# EAGLE board rain sensor (EAGLE 6.5.0)
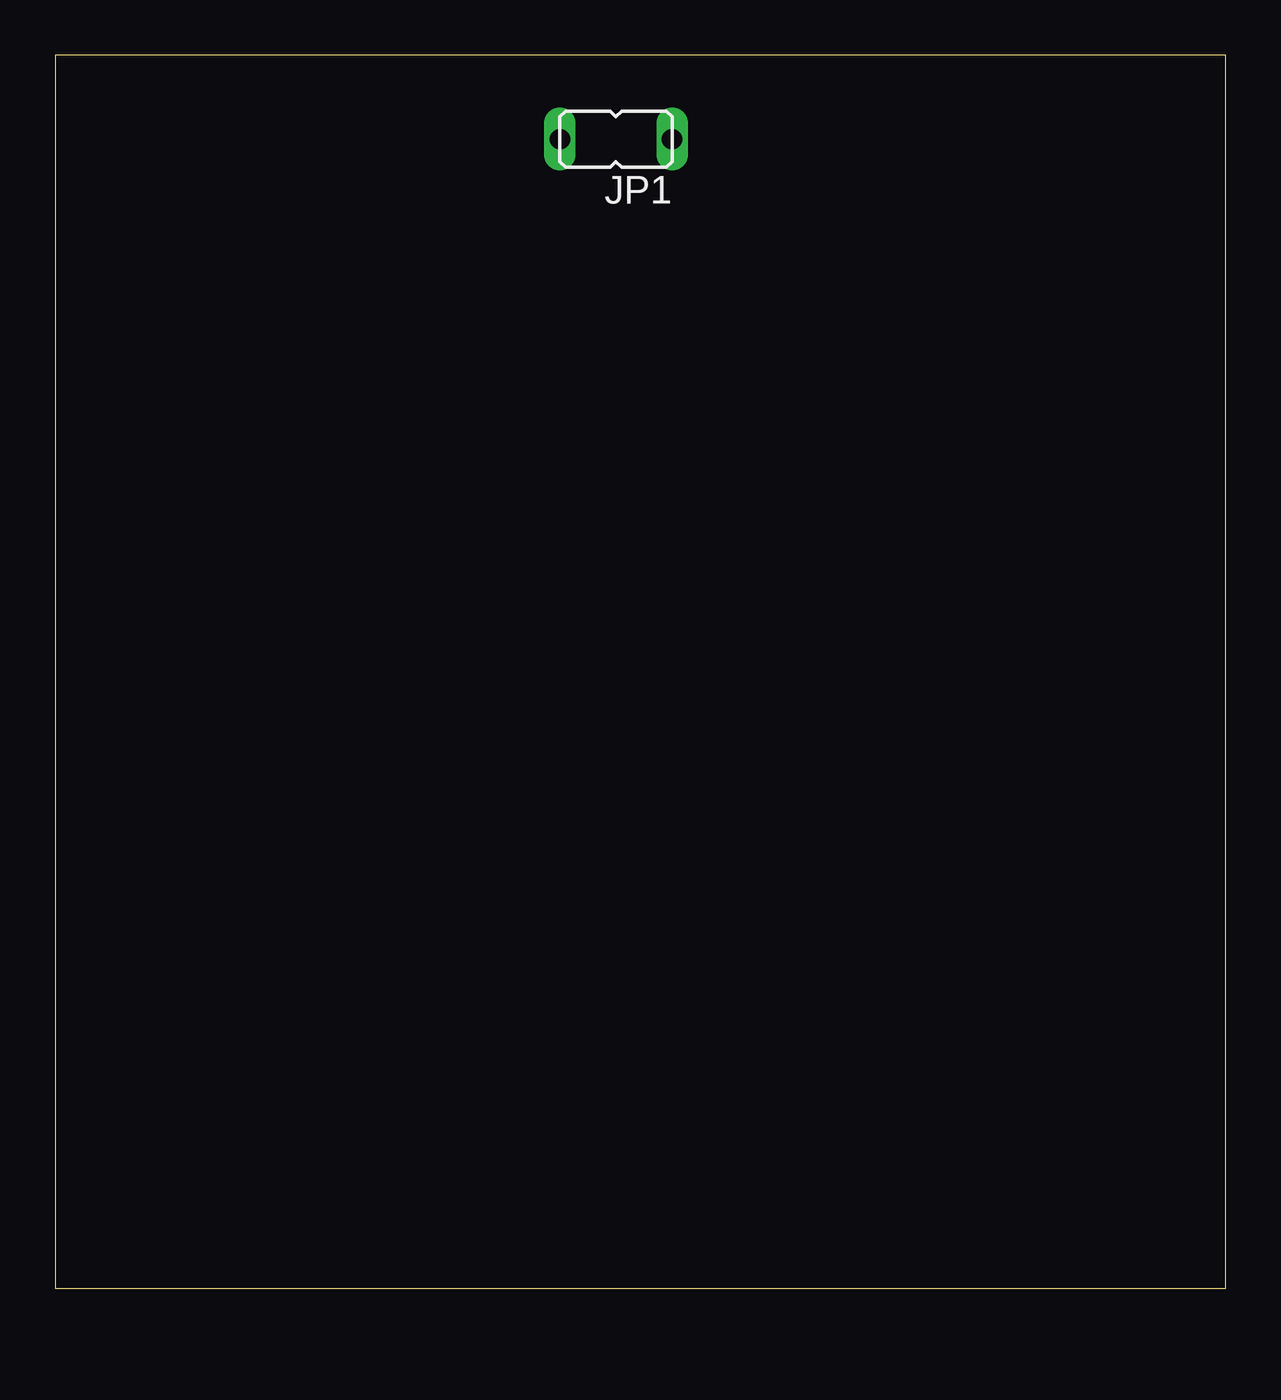
[diagram p0: board, top side]
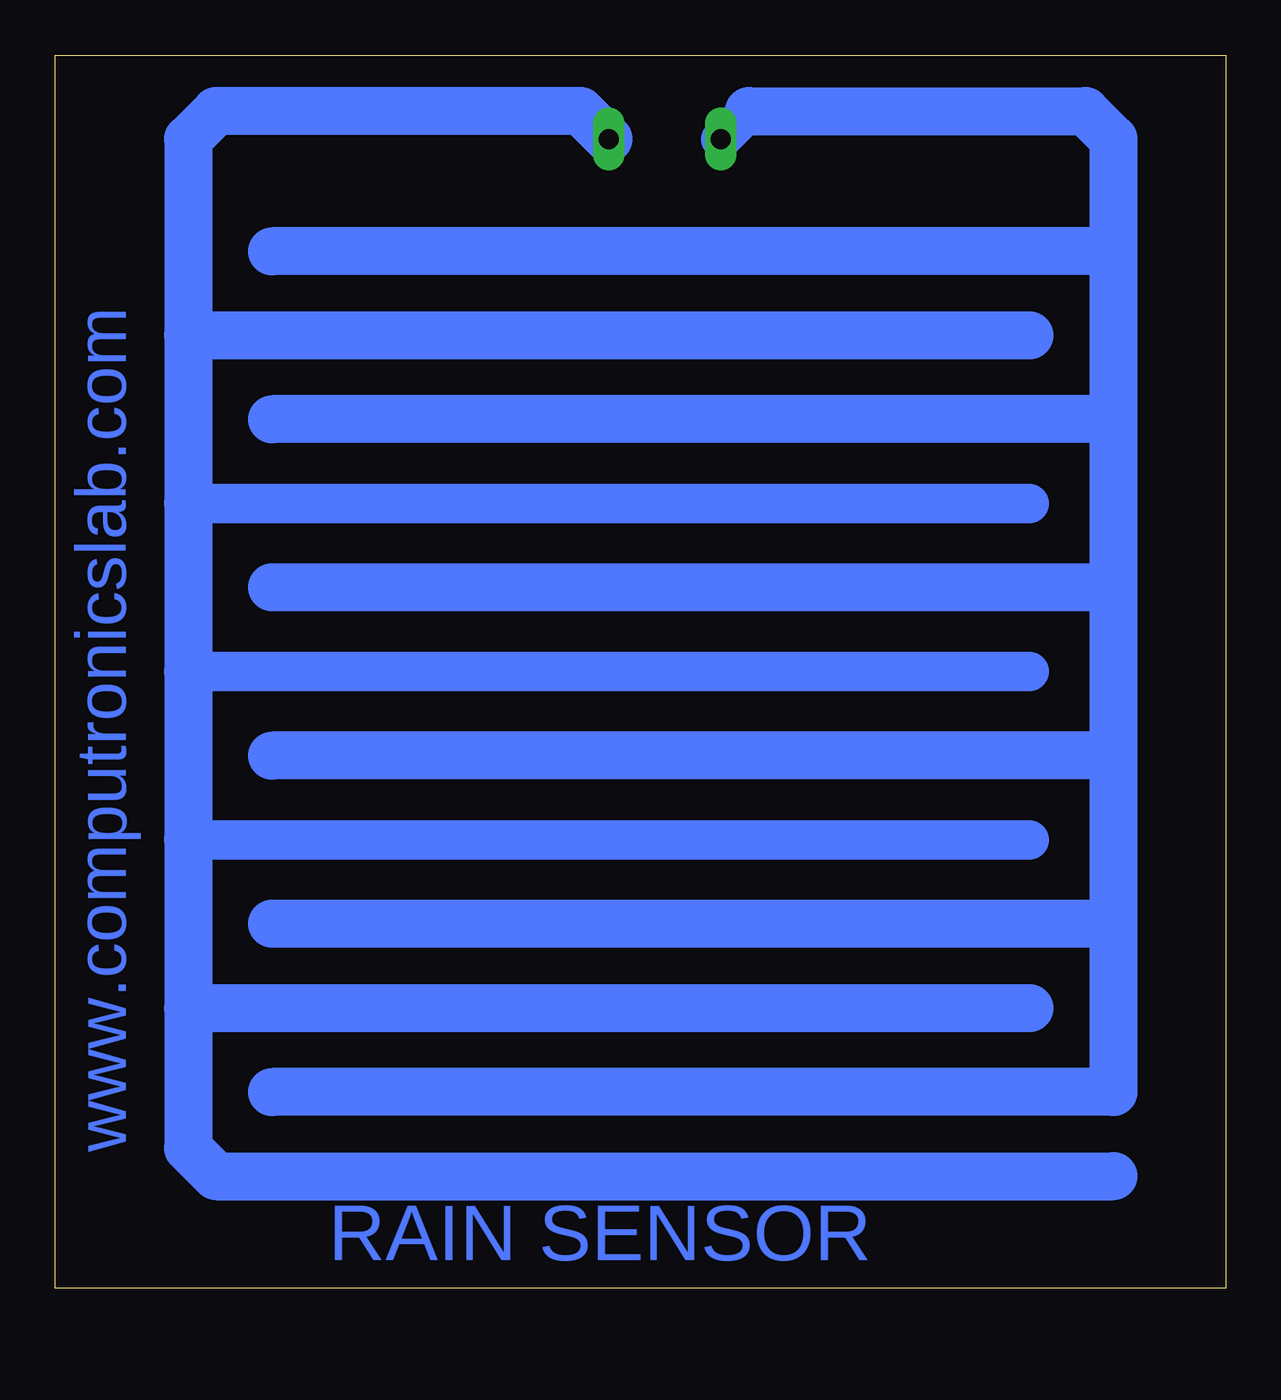
[diagram p1: board, bottom side, seen from below]

Size 53.01 x 55.87 mm. Coordinates in mm from the lower left corner, seen from the top.
Outline: 0,0 53.01,0 53.01,55.87 0,55.87 0,0
Copper layers (1*16): Top 0.035mm / dielectric 1.5mm / Bottom 0.035mm
Design rules "default": minimum track width 10mil, minimum drill 24mil, track to track 8mil, track to pad 8mil, pad to pad 8mil, via to via 8mil, smd to smd 8mil, copper to edge 40mil, drill to drill 8mil, minimum pad ring 10mil, minimum via ring 8mil, stop-mask expansion 4mil, vias tented up to drill 0mil, thermal gap 10mil

## Footprints (pad centres in the part's own frame; a part is rotated, then mirrored left to right if it is on the bottom)
JP1 = drill 0.914 long: 1 0,-2.54; 2 0,2.54

## Placement (x,y rotation side)
JP1  ac connector  [JP1]  25.4,52.07 90 top

## Library data of the parts
JP1 = jumper

## Tracks (layer width: path | path; a pad name or v marks a point on that pad's centre or on a via)
N$1
  Bottom 1.778: 22.86,52.07 21.59,53.34
  Bottom 2.184: 21.59,53.34 6.35,53.34 5.08,52.07 5.08,46.99 | 5.08,46.99 5.08,39.37 | 5.08,39.37 5.08,31.75 | 5.08,31.75 5.08,24.13 | 5.08,24.13 5.08,16.51 | 5.08,16.51 5.08,8.89 43.18,8.89 | 5.08,16.51 43.18,16.51 | 5.08,24.13 43.18,24.13 | 5.08,31.75 43.18,31.75 | 5.08,39.37 43.18,39.37 | 5.08,46.99 43.18,46.99
N$2
  Bottom 1.778: 46.99,20.32 8.89,20.32 | 46.99,27.94 8.89,27.94 | 46.99,35.56 8.89,35.56
  Bottom 2.184: 27.94,52.07 29.21,53.34 45.72,53.34 46.99,52.07 46.99,43.18 | 46.99,43.18 46.99,35.56 46.99,27.94 46.99,20.32 46.99,12.7 | 46.99,12.7 46.99,6.35 45.72,5.08 5.08,5.08 | 46.99,12.7 8.89,12.7 | 46.99,43.18 8.89,43.18

## Text on the board
Bottom: www.computronicslab.com | RAIN SENSOR